# Altium PCB 剥皮器20200614.PCBDOC (part 2 of 2)
Units mil, origin at the board's own origin, x right, y up, seen from the top; angles counter-clockwise.
Board outline 5515.78 x 3626.02 mil, 4 copper layers (Top Layer, MidLayer1, MidLayer2, Bottom Layer); 100 components, 73 nets, 328 pads, 459 vias.
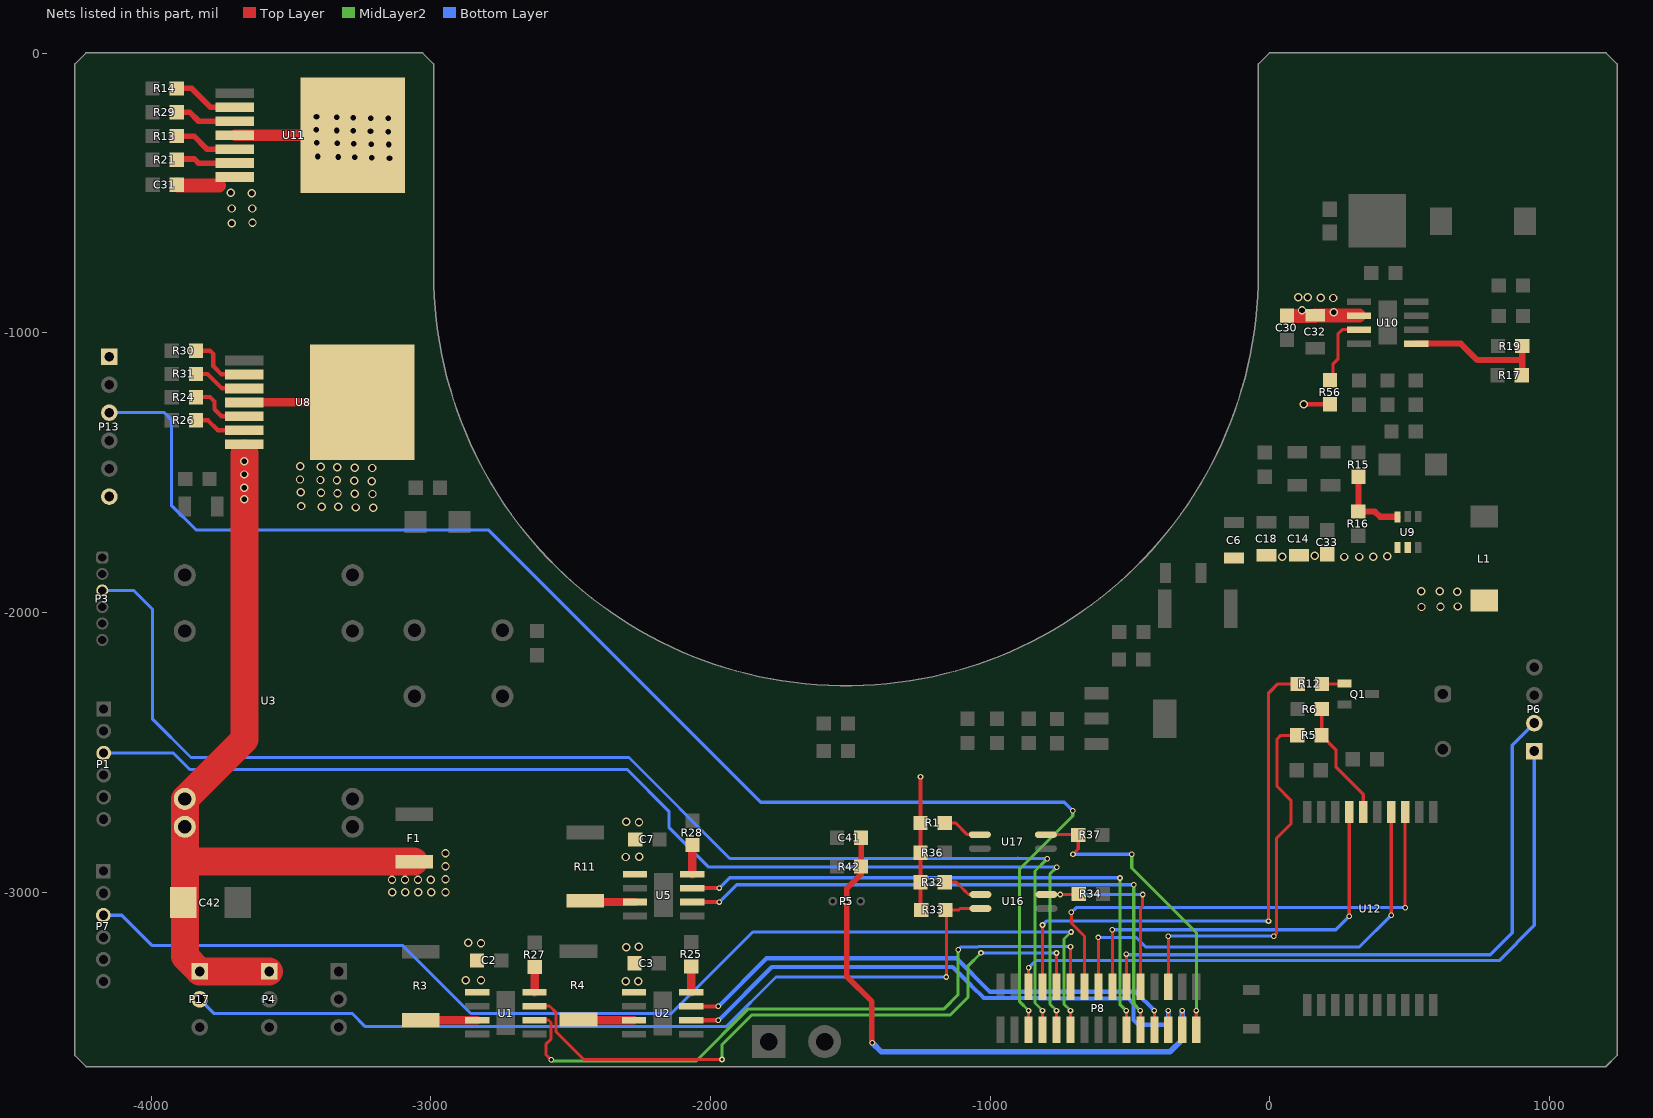
[diagram p4: the nets of this part, all layers, seen from the top]

## Via types
v1: diameter 30, hole 20, Top Layer to Bottom Layer, tented both sides, 193 vias
v2: diameter 20, hole 12, Top Layer to Bottom Layer, tented both sides, 148 vias
v3: diameter 40, hole 25, Top Layer to Bottom Layer, tented both sides, 118 vias

## Nets (pads, with @x,y where several pads share a name; then routed paths per layer and width w, separated by ;. In a path a pad name is that pad's centre, name@x,y a point inside that pad or via, vN(x,y) a via of type N, cw(c..) or ccw(c..) an arc to the next point about the centre after c; other vN are vias at no path point) (continued)
NetP13_1: P13.1 U11.4 U11.8 | length 421.3
  Top Layer w40: U11.4@-3701,-293 U11.8@-3279.74,-293
  other v1: -3148,-375 -3211,-374 -3273,-372 -3332,-371 -3405,-369 -3151,-326 -3214,-325 -3276,-323 -3335,-322 -3408,-320 -3153,-280 -3216,-279 -3278,-277 -3337,-276 -3410,-274 -3152,-233 -3215,-232 -3277,-230 -3336,-229 -3409,-227
NetP13_6: P13.6 U8.4 U8.8 | length 421.3
  Top Layer w30: U8.4@-3667,-1248 U8.8@-3245.74,-1248
  other v1: -3206,-1625 -3269,-1624 -3331,-1622 -3390,-1621 -3463,-1619 -3209,-1576 -3272,-1575 -3334,-1573 -3393,-1572 -3466,-1570 -3211,-1530 -3274,-1529 -3336,-1527 -3395,-1526 -3468,-1524 -3210,-1483 -3273,-1482 -3335,-1480 -3394,-1479 -3467,-1477
NetP17_2: P17.2 R33.2 U16.2 | length 3154.6
  Top Layer w11.02: v2@-1159.69,-3300.31 v2(-1157,-3303) -1157,-3065.69 R33.2@-1158.69,-3064 ; R33.2@-1159.69,-3063 R33.2@-1158.69,-3064 ; U16.2@-1035.11,-3058 -1108,-3058 -1114,-3064 R33.2@-1158.69,-3064
  Bottom Layer w11.02: P17.2@-3826.69,-3383.07 -3776.76,-3433 -3282,-3433 -3234.4,-3480.6 -1943.6,-3480.6 -1766,-3303 v2(-1157,-3303)
NetQ1_1: Q1.1 R12.1 | length 81.1
  Top Layer w11.02: R12.1@186.12,-2255.07 265.2,-2255.07 Q1.1@266.6,-2253.67
NetR1_2: R1.2 U17.1 | length 143
  Top Layer w11.02: R1.2@-1162.69,-2752 -1124,-2752 -1082,-2794 U17.1@-1037.11,-2794
NetR3_2: R3.2 U1.7 | length 182.7
  Top Layer w30: R3.2@-3017.31,-3457.05 -3017.26,-3457 U1.7@-2834.67,-3457
NetR4_2: R4.2 U2.7 | length 175.9
  Top Layer w30: R4.2@-2448.31,-3455.05 -2445.35,-3458 U2.7@-2273.67,-3458
NetR5_2: R5.2 R6.1 U12.6 | length 430.9
  Top Layer w11.02: R6.1@185.31,-2345 185.31,-2438 R5.2@184.31,-2439 237,-2491.69 237,-2553 333.81,-2649.81 U12.6@333.81,-2713.58
NetR11_2: R11.2 U5.7 | length 161.7
  Top Layer w19.68: R11.2@-2430,-3030.05 R11.2@-2425.05,-3035
  Top Layer w30: R11.2@-2425.05,-3035 U5.7@-2270.36,-3035
NetR13_2: R13.2 U11.5 | length 227.3
  Top Layer w20: R13.2@-3908.87,-296.01 -3846.99,-296.01 -3800,-343 U11.5@-3701,-343
NetR14_1: R14.1 U11.2 | length 235.8
  Top Layer w20: R14.1@-3908.87,-125.69 -3855.31,-125.69 -3788,-193 U11.2@-3701,-193
NetR15_2: R15.2 R16.1 U9.3 | length 272.1
  Top Layer w21.65: R15.2@317,-1514.31 317,-1637.69 R16.1@316,-1638.69 375.69,-1638.69 394.28,-1657.28 U9.3@455.6,-1657.28
NetR17_1: R17.1 R19.2 U10.5 | length 508.2
  Top Layer w21.65: U10.5@523.36,-1038 683,-1038 742,-1097 902.31,-1097 ; R17.1@900.31,-1151 902.31,-1149 902.31,-1097 ; R19.2@902.31,-1047 902.31,-1097
NetR21_2: R21.2 U11.6 | length 215.2
  Top Layer w20: R21.2@-3908.87,-380.69 -3906.18,-378 -3846,-378 -3831,-393 U11.6@-3701,-393
NetR24_2: R24.2 U8.5 | length 218.1
  Top Layer w15: R24.2@-3840.31,-1229.5 -3789.5,-1229.5 -3774,-1245 -3774,-1273 -3749,-1298 U8.5@-3667,-1298
NetR25_2: R25.2 U2.4 | length 92.7
  Top Layer w30: R25.2@-2069,-3265.31 -2069,-3357.95 U2.4@-2068.94,-3358
NetR26_2: R26.2 U8.6 | length 188
  Top Layer w15: R26.2@-3840.31,-1312.5 -3797.5,-1312.5 -3762,-1348 U8.6@-3667,-1348
NetR27_2: R27.2 U1.4 | length 90.1
  Top Layer w30: U1.4@-2629.94,-3357 -2629,-3356.06 R27.2@-2629,-3267.31
NetR28_2: R28.2 U5.4 | length 104
  Top Layer w30: U5.4@-2065.64,-2935 -2065.64,-2831.95 R28.2@-2065,-2831.31
NetR29_1: R29.1 U11.3 | length 221.4
  Top Layer w20: R29.1@-3908.87,-210.38 -3862.62,-210.38 -3830,-243 U11.3@-3701,-243
NetR30_2: R30.2 U8.2 | length 234.1
  Top Layer w11.02: R30.2@-3840.31,-1063.5 R30.2@-3830,-1063.5
  Top Layer w15: R30.2@-3830,-1063.5 -3789.5,-1063.5 -3778,-1075 -3778,-1119 -3749,-1148 U8.2@-3667,-1148
NetR31_2: R31.2 U8.3 | length 194.6
  Top Layer w15: R31.2@-3840.31,-1146.5 -3798.5,-1146.5 -3747,-1198 U8.3@-3667,-1198
NetR32_2: R32.2 U16.1 | length 169.4
  Top Layer w11.02: R32.2@-1162.69,-2964 -1122,-2964 -1104.71,-2981.29 ; -1088,-2998 -1104.71,-2981.29 ; U16.1@-1035.11,-3008 -1078,-3008 -1104.71,-2981.29
NetR56_1: R56.1 U10.3 | length 258.6
  Top Layer w11.02: R56.1@215,-1168.69 225,-1158.69 225,-1112 243,-1094 243,-1004 259,-988 U10.3@318.64,-988
P1_A: P1.3 P8.9 | length 4247.5
  Top Layer w11.02: P8.9@-763.19,-3491.84 -763.19,-3423.19 v2(-763,-3423)
  MidLayer2 w11.02: v2(-763,-3423) -786,-3400 -786,-2934 v2(-762,-2910)
  Bottom Layer w11.02: P1.3@-4169.99,-2502.75 -3920.25,-2502.75 -3862,-2561 -2298,-2561 -2149,-2710 -2149,-2767 -2006,-2910 -825,-2910 ; -789,-2910 -825,-2910 ; v2(-762,-2910) -825,-2910
P7_A: P7.3 P8.11 | length 4245.6
  Top Layer w11.02: P8.11@-713.19,-3491.84 -713.19,-3423.19 v2(-713,-3423)
  MidLayer2 w11.02: v2(-713,-3423) -736,-3400 -736,-3167 v2(-711,-3142)
  Bottom Layer w11.02: P7.3@-4171.51,-3082.23 -4105,-3082.23 -3996.23,-3191 -3099.82,-3191 -2857.22,-3433.6 -2140.6,-3433.6 -1849,-3142 -1056,-3142 ; -1034,-3142 -1056,-3142 ; -735,-3142 -862,-3142 ; v2(-711,-3142) -862,-3142 ; -1056,-3142 -862,-3142
P13_A: P8.5 P13.3 | length 5089.4
  Top Layer w11.02: P8.5@-863.19,-3491.84 -863.19,-3423.19 v2(-863,-3423)
  MidLayer2 w11.02: v2(-863,-3423) -895,-3391 -895,-2917 -705,-2727 v2(-705,-2708)
  Bottom Layer w11.02: P13.3@-4149.91,-1285.07 -3952.93,-1285.07 -3928,-1310 -3928,-1616 -3840,-1704 -2795,-1704 -1821,-2678 -735,-2678 v2(-705,-2708)
PA2_A: P8.8 R12.2 | length 1969.4
  Top Layer w11.02: P8.8@-813.19,-3338.3 v2(-813.19,-3117.19) v2@-813,-3117
  Top Layer w12: v2@-4,-3104 v2(-5,-3103) -5,-2289 28.93,-2255.07 R12.2@99.5,-2255.07
  Bottom Layer w12: v2(-813.19,-3117.19) -799,-3103 v2(-5,-3103)
PA3_A: P3.3 P8.7 | length 4650.4
  Top Layer w11.02: P8.7@-813.19,-3491.84 -813.19,-3423.19 v2(-813,-3423)
  MidLayer2 w11.02: v2(-813,-3423) -840,-3396 -840,-2924 v2(-796,-2880)
  Bottom Layer w11.02: P3.3@-4175.19,-1920.88 -4062.12,-1920.88 -3996,-1987 -3996,-2063 -3996,-2380 -3858,-2518 -2292,-2518 -1931,-2879 -902,-2879 -901,-2880 ; -900,-2878 -901,-2879 -901,-2880 ; v2(-796,-2880) -901,-2880
PA6_A: P8.16 U12.4 | length 1654.1
  Top Layer w11.02: P8.16@-613.19,-3338.3 v2(-613.19,-3161.59) v2@-613,-3161.4 ; U12.4@433.81,-2713.58 v2(433.81,-3081.81) v2@434,-3082
  Bottom Layer w11.02: v2@-613.19,-3161.4 -478.6,-3161.4 -444,-3196 319.62,-3196 v2(433.81,-3081.81)
PB5_A: P8.25 U2.2 | length 2018
  Top Layer w11.02: P8.25@-363.19,-3491.84 -363.19,-3423.19 v2(-363,-3423)
  Top Layer w15: U2.2@-2068.94,-3458 v2(-1972.31,-3458)
  Bottom Layer w15: v2(-1972.31,-3458) -1781.31,-3267 -1134,-3267 -1074,-3327 -1066.5,-3334.5 -1022.91,-3378.09 -826.91,-3378.09 -825,-3380 -506,-3380 -487,-3399 -487,-3412.23 -487.59,-3412.82 -487.59,-3456.41 -470,-3474 -375.19,-3474 -363.19,-3462 -363.19,-3423.19 v2(-363,-3423)
PB6_A: P8.10 U1.3 | length 2362.3
  Top Layer w11.02: U1.3@-2629.95,-3407 -2576,-3407 -2552.23,-3430.77 -2552.23,-3499.77 -2454.4,-3597.6 -1959.4,-3597.6 v2(-1959,-3598) ; P8.10@-763.19,-3338.3 v2(-763.19,-3217.19) v2@-763,-3217
  MidLayer2 w11.02: v2(-1959,-3598) -1959,-3545 -1853,-3439 -1143,-3439 -1080,-3376 -1080,-3264 v2(-1033,-3217)
  Bottom Layer w11.02: v2(-1033,-3217) v2@-763,-3217
PB7_A: P8.12 U1.2 | length 2479.1
  Top Layer w11.02: U1.2@-2629.94,-3457 -2579.34,-3457 -2570.34,-3466 -2570.34,-3525.34 -2589,-3544 -2589,-3580 v2(-2570.34,-3598.66) ; P8.12@-713.19,-3338.3 v2@-713.19,-3194.59
  MidLayer2 w11.02: v2(-2570.34,-3598.66) -2565.16,-3603.84 -2051.84,-3603.84 -1865,-3417 -1165,-3417 -1115,-3367 v2(-1115,-3205)
  Bottom Layer w11.02: v2(-1115,-3205) -1105.6,-3195.6 -1043.56,-3195.6 -1042.36,-3194.4 -754.02,-3194.4 v2(-713,-3194.4)
PE3_A: P8.19 U5.3 | length 2097.5
  Top Layer w11.02: P8.19@-513.19,-3491.84 -513.19,-3423.19 v2(-513,-3423)
  Top Layer w15: U5.3@-2065.64,-2985 v2(-1969,-2985)
  MidLayer2 w12: v2(-536,-2949) -536.09,-2949.09 -536.09,-3399.91 v2(-513,-3423)
  Bottom Layer w12: v2(-1969,-2985) -1932,-2948 v2@-536,-2948
PE5: P8.22 R34.1 U16.4 | length 745.1
  Top Layer w11.02: U16.4@-798.89,-3008 -685.31,-3008 R34.1@-683.31,-3006 ; P8.22@-463.19,-3338.3 -463.19,-3058.19 -456,-3051 -456,-3009 v2(-455,-3008)
  Bottom Layer w11.02: v2(-750,-3008) v2(-455,-3008)
PG5_A: P8.21 U5.2 | length 2133.2
  Top Layer w11.02: P8.21@-463.19,-3491.84 -463.19,-3423.19 v2(-463,-3423)
  Top Layer w15: U5.2@-2065.64,-3035 v2(-1969,-3035)
  MidLayer2 w12: v2(-487,-2973) -487,-2978 -487,-3258 -487,-3399 v2(-463,-3423)
  Bottom Layer w12: v2(-1969,-3035) -1907,-2973 v2(-487,-2973)
PH0_RXD2_A: P8.18 U12.7 | length 1443.6
  Top Layer w11.02: P8.18@-563.19,-3338.3 v2(-563.19,-3134) ; v2(283.81,-3086) U12.7@283.81,-2713.58
  Bottom Layer w11.02: v2(-563.19,-3134) 235.81,-3134 v2(283.81,-3086)
PH1_TXD2: P8.26 R5.1 | length 1386.8
  Top Layer w11.02: P8.26@-363.19,-3338.3 v2@-363.19,-3157.19 ; v2(14,-3157) 23,-3148 23,-2808 75,-2756 75,-2671 26,-2622 26,-2452 39,-2439 R5.1@97.69,-2439
  Bottom Layer w11.02: v2(-364,-3157) v2(14,-3157)
PH5_A: P8.23 U2.3 | length 1873.6
  Top Layer w11.02: P8.23@-413.19,-3491.84 -413.19,-3423.19 v2(-413,-3423)
  Top Layer w15: U2.3@-2068.95,-3408 v2(-1972.31,-3408)
  Bottom Layer w15: v2(-1972.31,-3408) -1800.31,-3236 -1121,-3236 -1001,-3356 -480,-3356 v2(-413,-3423)
PJ0_RX3_A: P6.2 P8.20 | length 2312.1
  Top Layer w11.02: P8.20@-513.19,-3338.3 -513.19,-3221.19 v2(-513,-3221)
  Bottom Layer w12: v2(-513,-3221) -511,-3223 788.37,-3223 867,-3144.37 867,-2473.81 P6.2@945.35,-2395.46
PJ1_A: P6.1 P8.6 | length 2562.9
  Top Layer w11.02: P8.6@-863.19,-3338.3 -863.19,-3269.65 v2(-863,-3269.46)
  Bottom Layer w12: v2(-863,-3269.46) -837.77,-3244.23 819.77,-3244.23 945.35,-3118.65 P6.1@945.35,-2495.46
PK1: P8.29 R37.1 U17.4 | length 1127.3
  Top Layer w11.02: U17.4@-800.89,-2794 -686.31,-2794 R37.1@-685.31,-2795 -685.31,-2845.31 v2(-704,-2864) v2@-703,-2864 ; P8.29@-263.19,-3491.84 -263.19,-3423.19 v2(-263,-3423)
  MidLayer2 w11.02: v2(-494,-2864) -494,-2913 -263,-3144 v2(-263,-3423)
  Bottom Layer w11.02: v2(-704,-2864) v2(-494,-2864)
PK3_A: P8.14 U12.3 | length 1828.1
  Top Layer w11.02: v2(-710,-3072) -709,-3073 -709,-3112 -663.19,-3157.81 -663.19,-3269.65 P8.14@-663.19,-3338.3 ; U12.3@483.81,-2713.58 v2(483.81,-3054.81) v2@484,-3055
  Bottom Layer w11.02: v2(-710,-3072) -692.81,-3054.81 v2(483.81,-3054.81)
VCC: C2.1 C3.1 C6.1 C7.1 C14.1 C18.1 C30.2 C31.1 C32.1 C33.2 C42.1 F1.1 L1.1 P4.1 P17.1 R1.1 R32.1 R33.1 R36.1 R56.2 U1.5 U2.5 U3.22 U3.23 U5.5 U8.7 U9.4 U9.5 U10.2 U11.7 | length 3985.1
  Top Layer w15: v2@-1249,-2587 v2(-1249.31,-2587.31) R1.1@-1249.31,-2752 -1249.31,-3060 R33.1@-1246.31,-3063 ; v1@121,-1255 132,-1255 132.31,-1255.31 R56.2@215,-1255.31
  Top Layer w50: C31.1@-3908.49,-469.69 -3905.18,-473 -3757,-473 ; C30.2@61,-938.69 160.65,-938.69 C32.1@162,-937.34 162.66,-938 U10.2@318.64,-938
  Top Layer w100: -3851.35,-2890.65 F1.1@-3060,-2890.65 ; -3667,-1431 v1(-3667,-1459) v1(-3667,-1506) v1(-3667,-1553) v1(-3667,-1594) -3667,-2453 U3.22@-3880,-2666 U3.23@-3880,-2766 -3880,-3229.76 P17.1@-3826.69,-3283.07 P4.1@-3578.2,-3283.07
  other v1: -2304,-3318 -2258,-3318 -2875,-3314 -2821,-3314 -2302,-3196 -2257,-3195 -2821,-3182 -2867,-3181 -3138,-3000 -3091.67,-3000 -3045.33,-3000 -2999,-3000 -2948,-3000 -3139,-2955 -3092.67,-2955 -3046.33,-2955 -3000,-2955 -2948,-2953.67 -2948,-2907.33 -2304,-2874 -2255,-2873 -2948,-2861 -2256,-2749 -2302,-2748 542,-1980 610,-1979 672,-1978 670,-1925 541,-1923 607,-1923 266,-1801 319,-1801 44,-1800 370,-1800 419,-1799 160.16,-1796.84 121,-1255.31 229,-926 114.76,-919.03 226,-875 182,-874 101,-873 136,-873 -3712,-608 -3638,-606 -3712,-555 -3639,-555 -3640,-500 -3716,-499
霍尔: C41.1 P5.2 P8.27 R42.2 | length 2105.9
  Top Layer w11.02: P8.27@-313.19,-3491.84 -313.19,-3423.19 v2(-313,-3423)
  Top Layer w20: C41.1@-1461.69,-2805 R42.2@-1461.69,-2908 -1461.69,-2935.69 -1513.19,-2987.19 P5.2@-1513.19,-3032.07 -1513.19,-3300.81 -1423,-3391 -1423,-3538 v2(-1422,-3538)
  Bottom Layer w20: v2(-1422,-3538) -1389,-3571 -358,-3571 -313,-3526 v2(-313,-3423)
pads on no net: P1.4 P3.4 P7.4 P13.4 U3.9 U3.11 U9.6 U12.2 U12.8 U12.12 U12.13 U12.14 U12.15 U12.16 U12.17 U12.18 U12.19

## Polygon pours and split planes (outlines as drawn)
GND on MidLayer1 "Top Layer-No Net" (solid, remove dead copper): -1126,-3162.83 -1126,-3499 -618.65,-3499 -618.65,-2946 -618.65,-2944 26,-2944 42,-2944 42,-3001 42,-3386 104,-3386 212,-3386 212,-3332 212,-2991.81 151.67,-2991.81 151,-2991.81 151,-2945 151,-2947 418,-2947 420,-2947 420,-3013 420,-3034.09 475.23,-3034.09 479,-3034.09 479,-3102 479,-3112 523,-3112 522,-3112 522,-3218 522,-3395 586,-3395 646,-3395 646,-3367 646,-2924 670,-2924 669,-2924 669,-2849 669,-2601 597,-2601 513,-2601 513,-2480.99 513,-2419 -257,-2419 -257,-1709 -257,-1717 -365,-1717 -305,-1717 -305,321 -305,300 1387,300 1906,300 1906,-3830 1906,-3841 -4571,-3841 -4456,-3841 -4456,456 -4456,133 -2423,133 -2551,133 -2551,-1707 -2551,-1704.33 -3603.65,-1704.33 -3614,-1704.33 -3614,-1252 -3614,-1248.8 -4095.65,-1248.8 -4095.65,-2620.82 -3136.65,-2620.82 -3136.65,-2225.82 -2972.65,-2225.82 -2972.65,-2678.82 -2972.65,-2679.41 -1137.65,-2679.41 -1137.65,-2921.91 -1617.65,-2921.91 -1617.65,-3153.26 -1617.65,-3154 -1126,-3154 -1126,-3178.69
AGND on MidLayer1 "Top Layer-No Net" (solid, remove dead copper): -2636,-1819 -2636,-1818 -349,-1818 -349,-2411 -349,-2464 313,-2464 457,-2464 457,-2539 457,-2644 613,-2644 621,-2644 621,-2750 621,-2857 163,-2857 -689,-2857 -689,-2948 -689,-3396.72 -1054,-3396.72 -1054,-3092.72 -1054,-3092 -1493.4,-3092 -1493.4,-2977 -1054,-2977 -1054,-2599 -1054,-2591 -2882,-2591 -2882,-2164.72 -2882,-2164 -3229,-2164 -3229,-2552 -3983,-2552 -3983,-1380 -3697,-1380 -3697,-1814.19 -3697,-1815 -2601,-1815
GND on MidLayer2 "Top Layer-No Net" (solid, remove dead copper): -1126,-3162.83 -1126,-3499 -618.65,-3499 -618.65,-2946 -618.65,-2944 26,-2944 42,-2944 42,-3001 42,-3386 104,-3386 212,-3386 212,-3332 212,-2991.81 151.67,-2991.81 151,-2991.81 151,-2945 151,-2947 418,-2947 420,-2947 420,-3013 420,-3034.09 475.23,-3034.09 479,-3034.09 479,-3102 479,-3112 523,-3112 522,-3112 522,-3218 522,-3395 586,-3395 646,-3395 646,-3367 646,-2924 670,-2924 669,-2924 669,-2849 669,-2601 597,-2601 513,-2601 513,-2480.99 513,-2419 -257,-2419 -257,-1709 -257,-1717 -365,-1717 -305,-1717 -305,321 -305,300 1387,300 1906,300 1906,-3830 1906,-3841 -4571,-3841 -4456,-3841 -4456,456 -4456,133 -2423,133 -2551,133 -2551,-1707 -2551,-1704.33 -3603.65,-1704.33 -3614,-1704.33 -3614,-1252 -3614,-1248.8 -4095.65,-1248.8 -4095.65,-2620.82 -3136.65,-2620.82 -3136.65,-2225.82 -2972.65,-2225.82 -2972.65,-2678.82 -2972.65,-2679.41 -1137.65,-2679.41 -1137.65,-2921.91 -1617.65,-2921.91 -1617.65,-3153.26 -1617.65,-3154 -1126,-3154 -1126,-3178.69
AGND on MidLayer2 "Top Layer-No Net" (solid, remove dead copper): -2636,-1819 -2636,-1818 -349,-1818 -349,-2411 -349,-2464 313,-2464 457,-2464 457,-2539 457,-2644 613,-2644 621,-2644 621,-2750 621,-2857 163,-2857 -689,-2857 -689,-2948 -689,-3396.72 -1054,-3396.72 -1054,-3092.72 -1054,-3092 -1493.4,-3092 -1493.4,-2977 -1054,-2977 -1054,-2599 -1054,-2591 -2882,-2591 -2882,-2164.72 -2882,-2164 -3229,-2164 -3229,-2552 -3983,-2552 -3983,-1380 -3697,-1380 -3697,-1814.19 -3697,-1815 -2601,-1815
GND on Bottom Layer "Top Layer-No Net" (solid, remove dead copper): -1126,-3162.83 -1126,-3499 -618.65,-3499 -618.65,-2946 -618.65,-2944 26,-2944 42,-2944 42,-3001 42,-3386 104,-3386 212,-3386 212,-3332 212,-2991.81 151.67,-2991.81 151,-2991.81 151,-2945 151,-2947 418,-2947 420,-2947 420,-3013 420,-3034.09 475.23,-3034.09 479,-3034.09 479,-3102 479,-3112 523,-3112 522,-3112 522,-3218 522,-3395 586,-3395 646,-3395 646,-3367 646,-2924 670,-2924 669,-2924 669,-2849 669,-2601 597,-2601 513,-2601 513,-2480.99 513,-2419 -257,-2419 -257,-1709 -257,-1717 -365,-1717 -305,-1717 -305,321 -305,300 1387,300 1906,300 1906,-3830 1906,-3841 -4571,-3841 -4456,-3841 -4456,456 -4456,133 -2423,133 -2551,133 -2551,-1707 -2551,-1704.33 -3603.65,-1704.33 -3614,-1704.33 -3614,-1252 -3614,-1248.8 -4095.65,-1248.8 -4095.65,-2620.82 -3136.65,-2620.82 -3136.65,-2225.82 -2972.65,-2225.82 -2972.65,-2678.82 -2972.65,-2679.41 -1137.65,-2679.41 -1137.65,-2921.91 -1617.65,-2921.91 -1617.65,-3153.26 -1617.65,-3154 -1126,-3154 -1126,-3178.69
AGND on Bottom Layer "Top Layer-No Net" (solid, remove dead copper): -2636,-1819 -2636,-1818 -349,-1818 -349,-2411 -349,-2464 313,-2464 457,-2464 457,-2539 457,-2644 613,-2644 621,-2644 621,-2750 621,-2857 163,-2857 -689,-2857 -689,-2948 -689,-3396.72 -1054,-3396.72 -1054,-3092.72 -1054,-3092 -1493.4,-3092 -1493.4,-2977 -1054,-2977 -1054,-2599 -1054,-2591 -2882,-2591 -2882,-2164.72 -2882,-2164 -3229,-2164 -3229,-2552 -3983,-2552 -3983,-1380 -3697,-1380 -3697,-1814.19 -3697,-1815 -2601,-1815
GND on Top Layer "Top Layer-No Net" (solid, remove dead copper): -1126,-3162.83 -1126,-3499 -618.65,-3499 -618.65,-2946 -618.65,-2944 26,-2944 42,-2944 42,-3001 42,-3386 104,-3386 212,-3386 212,-3332 212,-2991.81 151.67,-2991.81 151,-2991.81 151,-2945 151,-2947 418,-2947 420,-2947 420,-3013 420,-3034.09 475.23,-3034.09 479,-3034.09 479,-3102 479,-3112 523,-3112 522,-3112 522,-3218 522,-3395 586,-3395 646,-3395 646,-3367 646,-2924 670,-2924 669,-2924 669,-2849 669,-2601 597,-2601 513,-2601 513,-2480.99 513,-2419 -257,-2419 -257,-1709 -257,-1717 -365,-1717 -305,-1717 -305,321 -305,300 1387,300 1906,300 1906,-3830 1906,-3841 -4571,-3841 -4456,-3841 -4456,456 -4456,133 -2423,133 -2551,133 -2551,-1707 -2551,-1704.33 -3603.65,-1704.33 -3614,-1704.33 -3614,-1252 -3614,-1248.8 -4095.65,-1248.8 -4095.65,-2620.82 -3136.65,-2620.82 -3136.65,-2225.82 -2972.65,-2225.82 -2972.65,-2678.82 -2972.65,-2679.41 -1137.65,-2679.41 -1137.65,-2921.91 -1617.65,-2921.91 -1617.65,-3153.26 -1617.65,-3154 -1126,-3154 -1126,-3178.69
AGND on Top Layer "Top Layer-No Net" (solid, remove dead copper): -2636,-1819 -2636,-1818 -349,-1818 -349,-2411 -349,-2464 313,-2464 457,-2464 457,-2539 457,-2644 613,-2644 621,-2644 621,-2750 621,-2857 163,-2857 -689,-2857 -689,-2948 -689,-3396.72 -1054,-3396.72 -1054,-3092.72 -1054,-3092 -1493.4,-3092 -1493.4,-2977 -1054,-2977 -1054,-2599 -1054,-2591 -2882,-2591 -2882,-2164.72 -2882,-2164 -3229,-2164 -3229,-2552 -3983,-2552 -3983,-1380 -3697,-1380 -3697,-1814.19 -3697,-1815 -2601,-1815

## Keep-outs
Keep-Out Layer:
  circle w3.94: c-314.96,-2867.23 r62.99
  circle w3.94: c-3917.32,-787.4 r62.99
  circle w3.94: c-313.98,-2867.23 r62.99
  circle w3.94: c-3916.34,-787.4 r62.99
  circle w3.94: c479.45,-172.23 r62.99
  circle w3.94: c-2716.54,-2867.23 r62.99
  lines w3.94: -1375,-3622.05 1200.79,-3622.05 ; -1323.19,-3622.05 -1665.98,-3622.05 -4232.29,-3622.05 -4271.66,-3582.68 -4271.66,-39.37 -4232.29,0 -3031.5,0 -2992.13,-39.37 -2992.13,-787.4 ccw(c-1515.75,-787.4) -39.37,-787.4 -39.37,-39.37 0,0 1200.79,0 1240.16,-39.37 1240.16,-3582 1200.79,-3621.37

## Other copper
Top Layer:
  rectangle net GND: -433,-3385 -397,-3247
  rectangle net GND: -2773,-3586 -2693,-3289
  rectangle net GND: -2206,-3566 -2136,-3320
  rectangle net GND: -2200,-3136 -2134,-2892
  rectangle net GND: 387,-1089 454,-884
  rectangle net AGND: -1010,-3386 -897,-3252
  rectangle net +5V: -280,-3390 -187,-3258
  rectangle net VCC: -3157,-3020 -2906,-2842
  rectangle net VCC: -3772,-665 -3609,-423
  rectangle net NetP13_6: -3496,-1651 -3185,-1351
  rectangle net VCC: 72,-957 245,-855
  rectangle net VCC: -172,-1837 418,-1765
  rectangle net VCC: 404,-1838 504,-1746
  rectangle net VCC: 525,-2017 828,-1905
  region net VCC: -2320,-2952 -2224,-2952 -2222,-2950 -2222,-2902 -2239,-2885 -2239,-2735 -2247,-2727 -2312,-2727 -2320,-2735 -2320,-2857 -2327,-2864 -2327,-2945
  region net VCC: -2890,-3370 -2787,-3370 -2786,-3369 -2786,-3330 -2805,-3311 -2805,-3169 -2811,-3163 -2880,-3163 -2883,-3166 -2883,-3297 -2895,-3309 -2895,-3365
  region net VCC: -2322,-3375 -2231,-3375 -2227,-3371 -2228,-3370 -2228,-3332 -2240,-3320 -2240,-3185 -2246,-3179 -2314,-3179 -2320,-3185 -2320,-3319 -2327,-3326 -2327,-3370
  region net NetC22_1: -2549,-2106 -2540,-2097 -2540,-2005 -2558,-1987 -2866,-1987 -2921,-2042 -2921,-2515 -2862,-2574 -1976,-2574 -1873,-2677 -1873,-3593 -1858,-3608 -1724,-3608 -1712,-3596 -1712,-2614 -1886,-2440 -2763,-2440 -2824,-2379 -2824,-2135 -2795,-2106
  region net NetP13_1: -4194,-1045 -4193,-1044 -4102,-1044 -4102,-975 -4047,-920 -3659,-920 -3468,-729 -3468,-392 -3436,-360 -3093,-360 -3093,-761 -3328,-996 -3987,-996 -4013,-1022 -4013,-1097.09 -4037.91,-1122 -4200,-1122 -4211,-1111 -4211,-1052 -4204,-1045
  region net NetC17_2: 479,-905 572,-905 581.78,-895.22 581.78,-754.22 662,-674 662,-486 648,-472 274,-472 265,-481 265,-695 288,-718 404,-718 415,-729 415,-825 430,-840 461,-840 473,-852 473,-899
  region net +5V: 852,-530 853,-529 1004,-529 1022,-547 1022,-985 1012.47,-994.53 880.53,-994.53 871,-985 871,-706 852,-687
  region net NetD3_1: 517,-1636 517,-1687 521,-1691 682,-1691 698,-1707 829,-1707 839,-1697 839,-1610 640.94,-1411.94 549.06,-1411.94 530.69,-1430.31 530.69,-1622.31
  region net +15V: 352.99,-1375 389.93,-1411.94 473.94,-1411.94 491.32,-1429.31 491.32,-1514.68 483.82,-1522.18 386.18,-1522.18 371,-1507 371,-1476 358,-1463 -90,-1463 -101,-1452 -101,-1383 -93,-1375
MidLayer2:
  rectangle net +5V: -249,-3392 88,-3260
  rectangle net +5V: 902,-2233 995.35,-2132
  rectangle net +5V: 956,-2233 1087,-544
  rectangle net NetP13_6: -4201,-1683 -3784,-1539
  rectangle net NetP13_6: -3976,-1683 -3784,-1292
  rectangle net NetP13_6: -3976,-1428 -3180,-1226
  rectangle net NetP13_6: -3501,-1648 -3183,-1320
  rectangle net VCC: -2331,-2901 -2222,-2549
  region net VCC: -2331,-2509 -869,-2509 -211,-1851 -211,-1850 84,-1555 84,-855 358,-855 363,-860 363,-946 353,-956 353,-1745 554,-1745 605,-1796 605,-1860 646,-1901 842,-1901 851,-1910 851,-2003 825,-2029 554,-2029 522,-1997 522,-1836 118,-1836 -762,-2716 -2331,-2716
Bottom Layer:
  rectangle net VCC: -2898,-3375 -2214.61,-3252
  rectangle net VCC: -2899,-3335 -2796,-3088
  rectangle net VCC: -2334,-3343 -2215,-3176
  rectangle net VCC: -3744,-1619 -3609,-468
  region net VCC: -3157,-2842 -2906,-2842 -2905,-2843 -2905,-3008 -2863,-3050 -2580,-3050 -2449,-2919 -2449,-2742 -2420,-2713 -2419,-2714 -2233,-2714 -2220.57,-2726.43 -2220.57,-2900.57 -2224,-2904 -2322,-2904 -2545,-3127 -3087,-3127 -3157,-3057

## Silkscreen, mask and mechanical layers (free items; w line width, h text height)
Top Overlay:
  circle w10: c-2716.54,-2867.23 r157.48
  circle w10: c479.45,-172.23 r157.48
  circle w10: c-313.98,-2867.23 r157.48
  circle w10: c-3916.34,-787.4 r157.48
  circle w19.68: c1049.61,-67.13 r7.87
  text "ISP" at 1063.82,-267.21 h40
  text "翻转" at -4242.95,-956.18 h40
  text "M-" at -4100,-1084 h40
  text "+5V" at -4143,-1200 h40
  text "A" at -4085,-1295 h40
  text "B" at -4074,-1397 h40
  text "GND" at -4011,-1476 h40
  text "M+" at -4008,-1617 h40
  text "M-" at -4058.19,-1807.4 h40
  text "GND" at -4071,-1869 h40
  text "A" at -4058.19,-1927.4 h40
  text "B" at -4058.19,-1987.4 h40
  text "+5V" at -4100,-2049 h40
  text "M+" at -4058.19,-2107.4 h40
  text "斜刀" at -4074,-2154 h40
  text "+5V" at 813.35,-2208.46 h40
  text "调刀" at -4235.79,-2243.19 h40
  text "GND" at 813.35,-2308.46 h40
  text "M-" at -4032.87,-2355.95 h40
  text "RX3" at 813.35,-2408.46 h40
  text "+5V" at -4081,-2443 h40
  text "TX3" at 813.35,-2508.46 h40
  text "A" at -4032.87,-2520.95 h40
  text "B" at -4032.87,-2590.95 h40
  text "GND" at -4032.87,-2675.95 h40
  text "M+" at -4043,-2765 h40
  text "夹紧" at -4134,-2888 h40
  text "M-" at -4041,-2937 h40
  text "+5V" at -4083,-3016 h40
  text "光纤" at -3348,-3079 h40
  text "A" at -4032.72,-3088.62 h40
  text "-" at -1443.19,-3101.09 h40
  text "+" at -1578,-3106 h40
  text "O" at -1523.19,-3108.07 h40
  text "B" at -4032.72,-3168.62 h40
  text "GND" at -4043,-3248 h40
  text "+" at -3188.58,-3294.77 h40
  text "M+" at -4032.72,-3328.62 h40
  text "电源输入" at -1880,-3354 h40
  text "-" at -3188.58,-3400.88 h40
  text "GND" at -1647,-3438 h40
  text "VCC" at -1838,-3440 h40
  text "IO" at -3186,-3564 h40
  text "光电开关" at -4112,-3568 h40
Mechanical 1:
  circle w1.97: c-1515.75,-787.4 r0.98
  circle w1.97: c-1515.75,-787.4 r0.98
  circle w1.97: c-1515.75,-787.4 r0.98
  circle w1.97: c-1515.75,-787.4 r0.98
Mechanical 15:
  lines w10: -960.67,-3464.57 -960.67,-2156.1 ; -879.92,-3464.57 -879.92,-2141.77 1240.16,-2141.77 ; -783.19,-2068.07 1240.16,-2068.07

## Dimensions
-4232.29,0 to -4232.29,-3622.05 on Top Overlay
-4271.66,-39.37 to 1240.16,-39.37 on Top Overlay

## Text inside footprints (layer, text, board x,y; h text height)
LS1: Top Overlay "+" at 648.59,-2275.18 h40 r270
P8: Top Overlay "2" at -976.19,-3241.19 h40 r180; Top Overlay "1" at -974.19,-3554.19 h40 r180
U12: Top Overlay "ANT" at 1093.81,-3028.07 h40 r270; Top Overlay "GND" at 568.81,-3258.07 h40 r270; Top Overlay "NC" at 519.37,-3258.07 h40 r270; Top Overlay "NC" at 469.92,-3258.07 h40 r270; Top Overlay "NC" at 420.48,-3258.07 h40 r270; Top Overlay "NC" at 371.03,-3258.07 h40 r270; Top Overlay "NC" at 321.59,-3258.07 h40 r270; Top Overlay "NC" at 272.14,-3258.07 h40 r270; Top Overlay "NC" at 222.7,-3258.07 h40 r270; Top Overlay "NC" at 173.25,-3258.07 h40 r270; Top Overlay "GND" at 123.81,-3258.07 h40 r270; Top Overlay "GND" at 118.81,-2773.07 h40 r270; Top Overlay "VCC" at 168.25,-2773.07 h40 r270; Top Overlay "AUX" at 217.7,-2773.07 h40 r270; Top Overlay "TXD" at 267.14,-2773.07 h40 r270; Top Overlay "RXD" at 316.59,-2773.07 h40 r270; Top Overlay "M2" at 366.03,-2773.07 h40 r270; Top Overlay "M1" at 415.48,-2773.07 h40 r270; Top Overlay "M0" at 464.92,-2773.07 h40 r270; Top Overlay "NC" at 514.37,-2773.07 h40 r270; Top Overlay "GND" at 563.81,-2773.07 h40 r270